# Altium PCB 1_ir-tara-f.PcbDoc (part 5 of 8)
Units mm, origin at the board's own origin, x right, y up, seen from the top; angles counter-clockwise.
Board outline 151 x 86.38 mm, 2 copper layers (Top Layer, Bottom Layer); 728 components, 20 nets, 2100 pads, 0 vias.
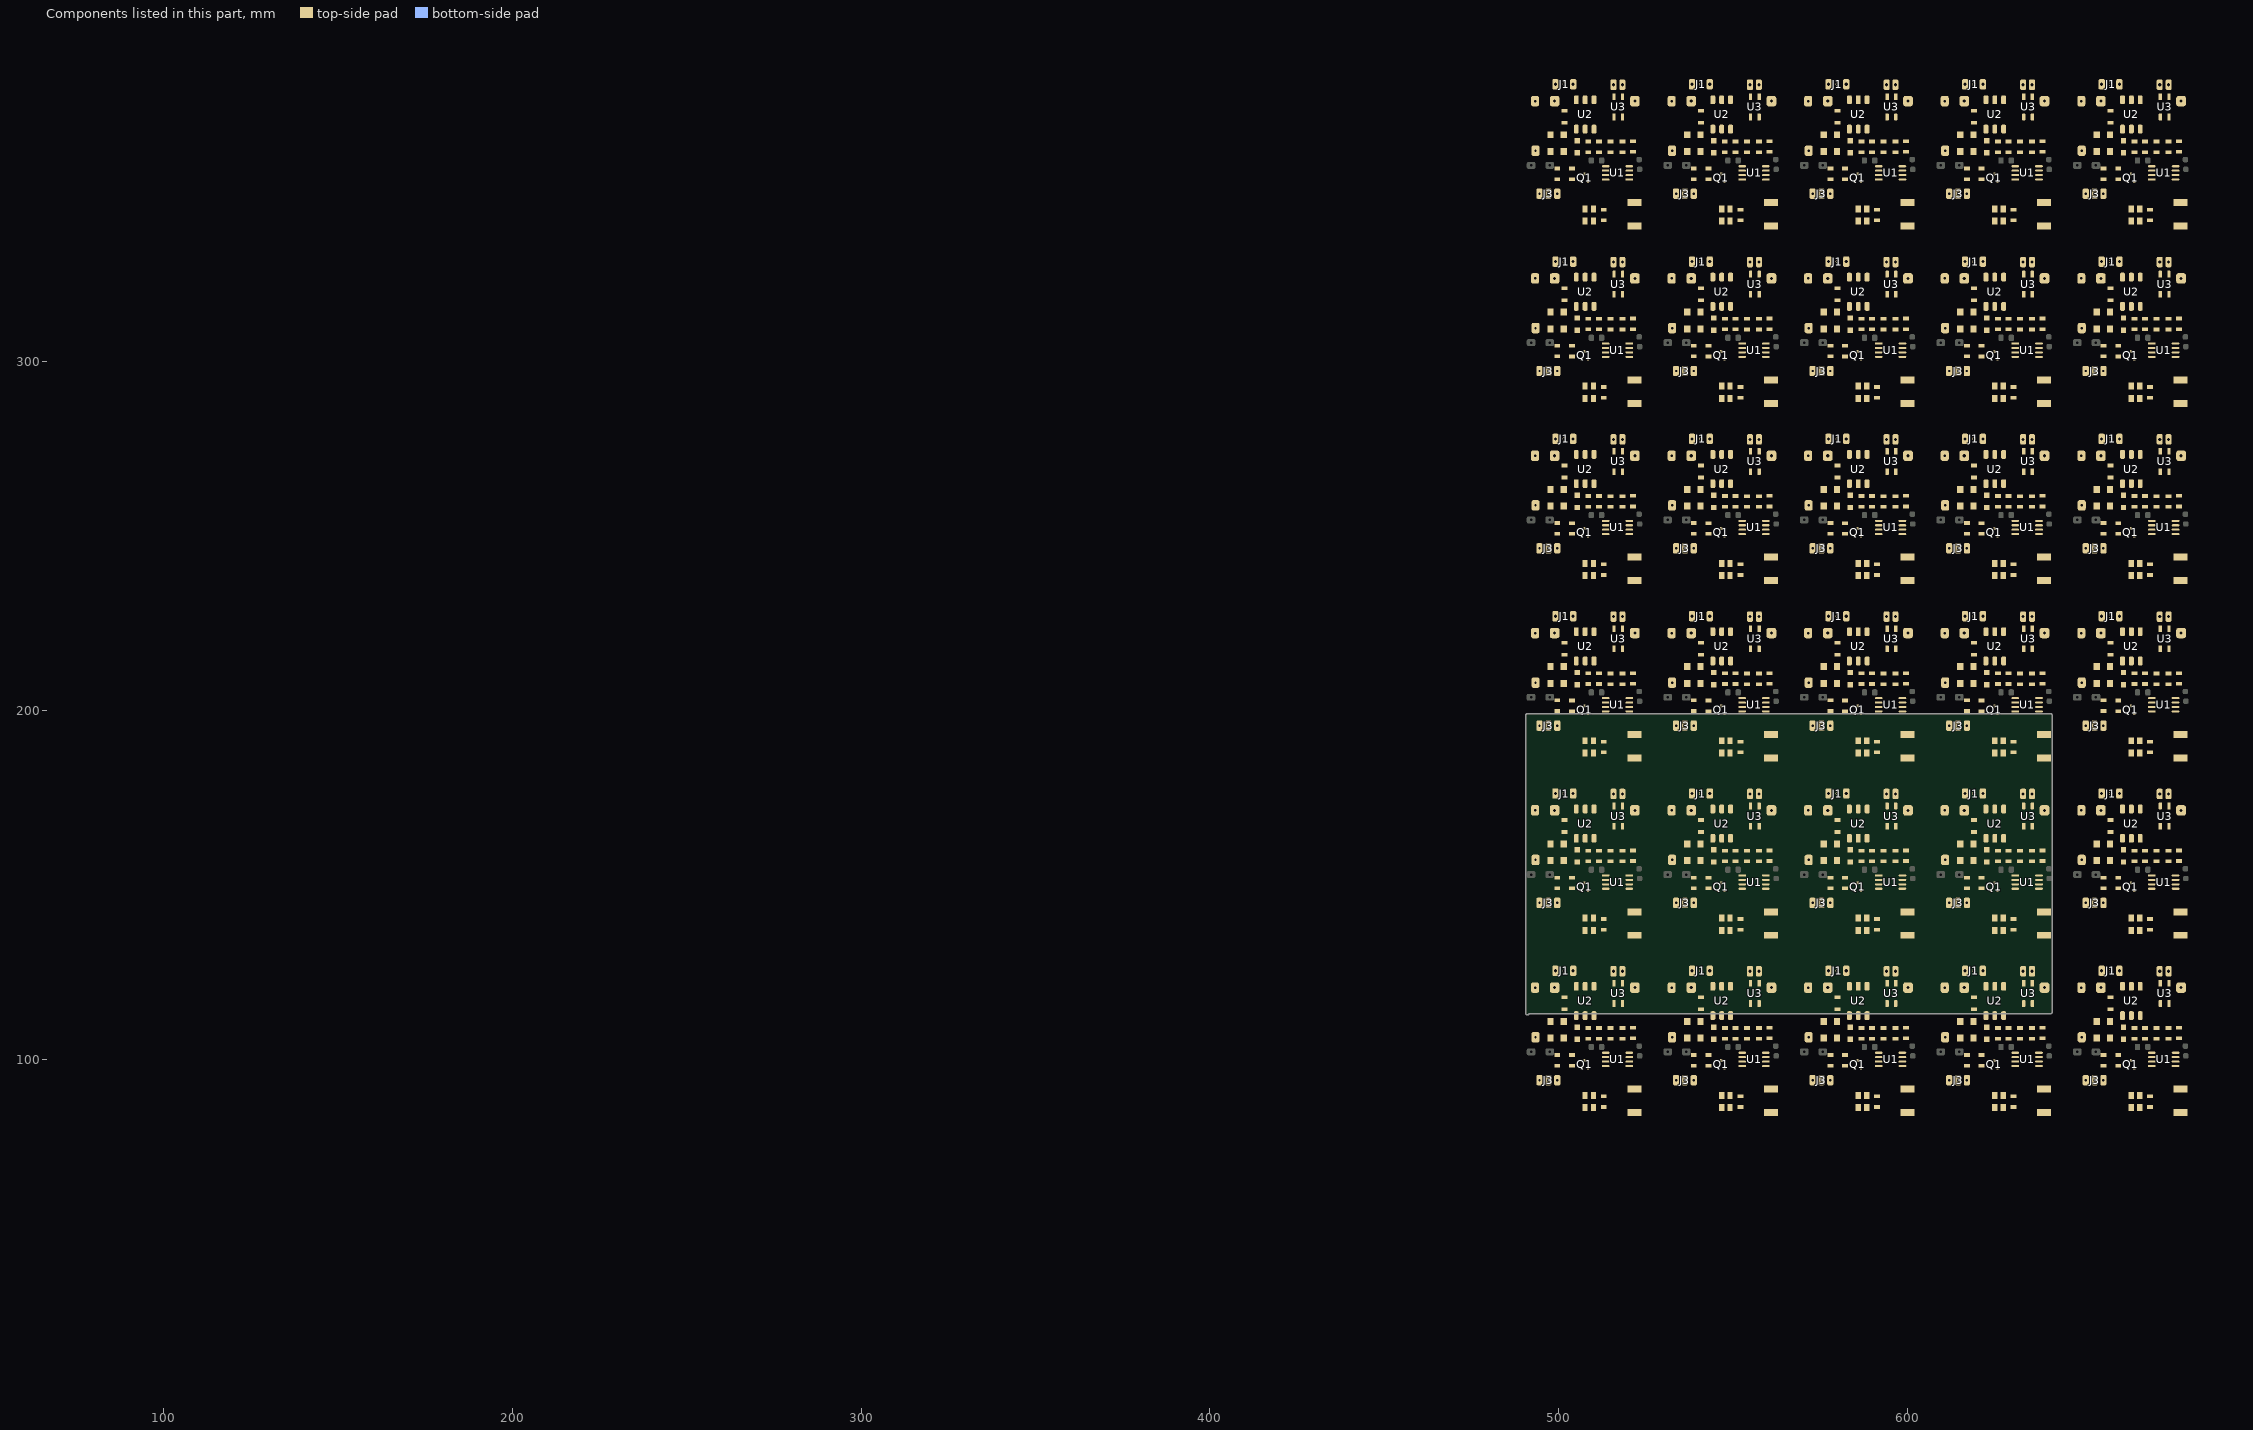
[diagram p5: the components of this part, seen from the top]

## Nets (pads, with @x,y where several pads share a name; then routed paths per layer and width w, separated by ;. In a path a pad name is that pad's centre, name@x,y a point inside that pad or via, vN(x,y) a via of type N, cw(c..) or ccw(c..) an arc to the next point about the centre after c; other vN are vias at no path point) (continued)
copper on no net: (continued)
  Top Layer w0.7: 501.619,117.921 510.382,117.921 515.335,112.968 518.383,112.968 ; 501.619,168.759 510.382,168.759 515.335,163.806 518.383,163.806 ; 501.619,219.598 510.382,219.598 515.335,214.645 518.383,214.645 ; 501.619,270.437 510.382,270.437 515.335,265.484 518.383,265.484 ; 501.619,321.275 510.382,321.275 515.335,316.322 518.383,316.322 ; 501.619,372.114 510.382,372.114 515.335,367.161 518.383,367.161 ; 503.833,98.206 504.158,98.206 504.433,97.931 504.433,97.835 504.726,97.542 506.561,97.542 ; 503.833,149.045 504.158,149.045 504.433,148.77 504.433,148.673 504.726,148.38 506.561,148.38 ; 503.833,199.884 504.158,199.884 504.433,199.609 504.433,199.512 504.726,199.219 506.561,199.219 ; 503.833,250.722 504.158,250.722 504.433,250.447 504.433,250.351 504.726,250.058 506.561,250.058 ; 503.833,301.561 504.158,301.561 504.433,301.286 504.433,301.189 504.726,300.896 506.561,300.896 ; 503.833,352.4 504.158,352.4 504.433,352.125 504.433,352.028 504.726,351.735 506.561,351.735 ; 505.175,112.982 505.175,115.225 505.585,115.635 510.382,115.635 512.541,113.476 512.541,112.333 514.7,110.174 514.7,108.993 ; 505.175,163.821 505.175,166.063 505.585,166.473 510.382,166.473 512.541,164.314 512.541,163.171 514.7,161.012 514.7,159.831 ; 505.175,214.659 505.175,216.902 505.585,217.312 510.382,217.312 512.541,215.153 512.541,214.01 514.7,211.851 514.7,210.67 ; 505.175,265.498 505.175,267.741 505.585,268.151 510.382,268.151 512.541,265.992 512.541,264.849 514.7,262.69 514.7,261.509 ; 505.175,316.337 505.175,318.579 505.585,318.989 510.382,318.989 512.541,316.83 512.541,315.687 514.7,313.528 514.7,312.347 ; 505.175,367.175 505.175,369.418 505.585,369.828 510.382,369.828 512.541,367.669 512.541,366.526 514.7,364.367 514.7,363.186 ; 508.411,97.607 508.411,97.241 508.35,97.18 508.35,96.331 504.667,92.648 504.667,84.236 505.018,83.885 519.796,83.885 521.193,85.282 521.431,85.282 ; 508.411,148.446 508.411,148.08 508.35,148.019 508.35,147.169 504.667,143.486 504.667,135.075 505.018,134.723 519.796,134.723 521.193,136.12 521.431,136.12 ; 508.411,199.284 508.411,198.918 508.35,198.857 508.35,198.008 504.667,194.325 504.667,185.913 505.018,185.562 519.796,185.562 521.193,186.959 521.431,186.959 ; 508.411,250.123 508.411,249.757 508.35,249.696 508.35,248.847 504.667,245.164 504.667,236.752 505.018,236.401 519.796,236.401 521.193,237.798 521.431,237.798 ; 508.411,300.961 508.411,300.596 508.35,300.535 508.35,299.685 504.667,296.002 504.667,287.591 505.018,287.239 519.796,287.239 521.193,288.636 521.431,288.636 ; 508.411,351.8 508.411,351.434 508.35,351.373 508.35,350.524 504.667,346.841 504.667,338.429 505.018,338.078 519.796,338.078 521.193,339.475 521.431,339.475 ; 510.128,120.969 510.128,120.419 510.478,120.069 510.647,120.069 514.212,116.503 515.783,116.503 515.888,116.398 515.888,116.037 ; 510.128,171.807 510.128,171.257 510.478,170.907 510.647,170.907 514.212,167.342 515.783,167.342 515.888,167.237 515.888,166.875 ; 510.128,222.646 510.128,222.096 510.478,221.746 510.647,221.746 514.212,218.18 515.783,218.18 515.888,218.075 515.888,217.714 ; 510.128,273.485 510.128,272.935 510.478,272.585 510.647,272.585 514.212,269.019 515.783,269.019 515.888,268.914 515.888,268.553 ; 510.128,324.323 510.128,323.773 510.478,323.423 510.647,323.423 514.212,319.858 515.783,319.858 515.888,319.753 515.888,319.391 ; 510.128,375.162 510.128,374.612 510.478,374.262 510.647,374.262 514.212,370.696 515.783,370.696 515.888,370.591 515.888,370.23 ; 512.125,108.685 513.331,107.479 520.006,107.479 520.745,108.218 520.745,108.819 ; 512.125,159.523 513.331,158.318 520.006,158.318 520.745,159.056 520.745,159.658 ; 512.125,210.362 513.331,209.156 520.006,209.156 520.745,209.895 520.745,210.497 ; 512.125,261.201 513.331,259.995 520.006,259.995 520.745,260.734 520.745,261.335 ; 512.125,312.039 513.331,310.834 520.006,310.834 520.745,311.572 520.745,312.174 ; 512.125,362.878 513.33,361.672 520.006,361.672 520.745,362.411 520.745,363.012 ; 515.239,105.856 515.427,105.668 515.427,105.541 516.224,104.744 516.224,101.157 515.716,100.649 ; 515.239,156.694 515.427,156.507 515.427,156.38 516.224,155.583 516.224,151.995 515.716,151.487 ; 515.239,207.533 515.427,207.345 515.427,207.218 516.224,206.421 516.224,202.834 515.716,202.326 ; 515.239,258.372 515.427,258.184 515.427,258.057 516.224,257.26 516.224,253.673 515.716,253.165 ; 515.239,309.21 515.427,309.023 515.427,308.896 516.224,308.099 516.224,304.511 515.716,304.003 ; 515.239,360.049 515.427,359.861 515.427,359.734 516.224,358.937 516.224,355.35 515.716,354.842 ; 517.756,100.149 517.756,105.768 517.931,105.943 518.256,105.943 ; 517.756,150.987 517.756,156.607 517.931,156.782 518.256,156.782 ; 517.756,201.826 517.756,207.445 517.931,207.62 518.256,207.62 ; 517.756,252.665 517.756,258.284 517.931,258.459 518.256,258.459 ; 517.756,303.503 517.756,309.123 517.931,309.298 518.256,309.298 ; 517.756,354.342 517.756,359.961 517.931,360.136 518.256,360.136 ; 518.637,105.856 518.767,105.986 521.304,105.986 ; 518.637,156.694 518.767,156.824 521.304,156.824 ; 518.637,207.533 518.767,207.663 521.304,207.663 ; 518.637,258.372 518.767,258.502 521.304,258.502 ; 518.637,309.21 518.767,309.34 521.304,309.34 ; 518.637,360.049 518.767,360.179 521.304,360.179 ; 540.773,117.921 549.536,117.921 554.489,112.968 557.537,112.968 ; 540.773,168.759 549.536,168.759 554.489,163.806 557.537,163.806 ; 540.773,219.598 549.536,219.598 554.489,214.645 557.537,214.645 ; 540.773,270.437 549.536,270.437 554.489,265.484 557.537,265.484 ; 540.773,321.275 549.536,321.275 554.489,316.322 557.537,316.322 ; 540.773,372.114 549.536,372.114 554.489,367.161 557.537,367.161 ; 542.988,98.206 543.313,98.206 543.588,97.931 543.588,97.835 543.881,97.542 545.715,97.542 ; 542.988,149.045 543.313,149.045 543.588,148.77 543.588,148.673 543.881,148.38 545.715,148.38 ; 542.988,199.884 543.313,199.884 543.588,199.609 543.588,199.512 543.881,199.219 545.715,199.219 ; 542.988,250.722 543.313,250.722 543.588,250.447 543.588,250.351 543.881,250.058 545.715,250.058 ; 542.988,301.561 543.313,301.561 543.588,301.286 543.588,301.189 543.881,300.896 545.715,300.896 ; 542.988,352.4 543.313,352.4 543.588,352.125 543.588,352.028 543.881,351.735 545.715,351.735 ; 544.329,112.982 544.329,115.225 544.74,115.635 549.536,115.635 551.695,113.476 551.695,112.333 553.854,110.174 553.854,108.993 ; 544.329,163.821 544.329,166.063 544.74,166.473 549.536,166.473 551.695,164.314 551.695,163.171 553.854,161.012 553.854,159.831 ; 544.329,214.659 544.329,216.902 544.739,217.312 549.536,217.312 551.695,215.153 551.695,214.01 553.854,211.851 553.854,210.67 ; 544.329,265.498 544.329,267.741 544.739,268.151 549.536,268.151 551.695,265.992 551.695,264.849 553.854,262.69 553.854,261.509 ; 544.329,316.337 544.329,318.579 544.739,318.989 549.536,318.989 551.695,316.83 551.695,315.687 553.854,313.528 553.854,312.347 ; 544.329,367.175 544.329,369.418 544.739,369.828 549.536,369.828 551.695,367.669 551.695,366.526 553.854,364.367 553.854,363.186 ; 547.565,97.607 547.565,97.241 547.504,97.18 547.504,96.331 543.821,92.648 543.821,84.236 544.173,83.885 558.95,83.885 560.347,85.282 560.585,85.282 ; 547.565,148.446 547.565,148.08 547.504,148.019 547.504,147.169 543.821,143.486 543.821,135.075 544.173,134.723 558.95,134.723 560.347,136.12 560.585,136.12 ; 547.565,199.284 547.565,198.918 547.504,198.857 547.504,198.008 543.821,194.325 543.821,185.913 544.173,185.562 558.95,185.562 560.347,186.959 560.585,186.959 ; 547.565,250.123 547.565,249.757 547.504,249.696 547.504,248.847 543.821,245.164 543.821,236.752 544.173,236.401 558.95,236.401 560.347,237.798 560.585,237.798 ; 547.565,300.961 547.565,300.596 547.504,300.535 547.504,299.685 543.821,296.002 543.821,287.591 544.173,287.239 558.95,287.239 560.347,288.636 560.585,288.636 ; 547.565,351.8 547.565,351.434 547.504,351.373 547.504,350.524 543.821,346.841 543.821,338.429 544.173,338.078 558.95,338.078 560.347,339.475 560.585,339.475 ; 549.282,120.969 549.282,120.419 549.632,120.069 549.801,120.069 553.367,116.503 554.937,116.503 555.042,116.398 555.042,116.037 ; 549.282,171.807 549.282,171.257 549.632,170.907 549.801,170.907 553.367,167.342 554.937,167.342 555.042,167.237 555.042,166.875 ; 549.282,222.646 549.282,222.096 549.632,221.746 549.801,221.746 553.367,218.18 554.937,218.18 555.042,218.075 555.042,217.714 ; 549.282,273.485 549.282,272.935 549.632,272.585 549.801,272.585 553.367,269.019 554.937,269.019 555.042,268.914 555.042,268.553 ; 549.282,324.323 549.282,323.773 549.632,323.423 549.801,323.423 553.367,319.858 554.937,319.858 555.042,319.753 555.042,319.391 ; 549.282,375.162 549.282,374.612 549.632,374.262 549.801,374.262 553.367,370.696 554.937,370.696 555.042,370.591 555.042,370.23 ; 551.279,108.685 552.485,107.479 559.161,107.479 559.899,108.218 559.899,108.819 ; 551.279,159.523 552.485,158.318 559.161,158.318 559.899,159.056 559.899,159.658 ; 551.279,210.362 552.485,209.156 559.161,209.156 559.899,209.895 559.899,210.497 ; 551.279,261.201 552.485,259.995 559.161,259.995 559.899,260.734 559.899,261.335 ; 551.279,312.039 552.485,310.834 559.161,310.834 559.899,311.572 559.899,312.174 ; 551.279,362.878 552.485,361.672 559.161,361.672 559.899,362.411 559.899,363.012 ; 554.394,258.372 554.581,258.184 554.581,258.057 555.378,257.26 555.378,253.673 554.87,253.165 ; 554.394,309.21 554.581,309.023 554.581,308.896 555.378,308.099 555.378,304.511 554.87,304.003 ; 554.394,360.049 554.581,359.861 554.581,359.734 555.378,358.937 555.378,355.35 554.87,354.842 ; 554.394,105.856 554.581,105.668 554.581,105.541 555.378,104.744 555.378,101.157 554.87,100.649 ; 554.394,156.694 554.581,156.507 554.581,156.38 555.378,155.583 555.378,151.995 554.87,151.487 ; 554.394,207.533 554.581,207.345 554.581,207.218 555.378,206.421 555.378,202.834 554.87,202.326 ; 556.91,100.149 556.91,105.768 557.085,105.943 557.41,105.943 ; 556.91,150.987 556.91,156.607 557.085,156.782 557.41,156.782 ; 556.91,201.826 556.91,207.445 557.085,207.62 557.41,207.62 ; 556.91,252.665 556.91,258.284 557.085,258.459 557.41,258.459 ; 556.91,303.503 556.91,309.123 557.085,309.298 557.41,309.298 ; 556.91,354.342 556.91,359.961 557.085,360.136 557.41,360.136 ; 557.791,105.856 557.922,105.986 560.458,105.986 ; 557.791,156.694 557.922,156.824 560.458,156.824 ; 557.791,207.533 557.922,207.663 560.458,207.663 ; 557.791,258.372 557.922,258.502 560.458,258.502 ; 557.791,309.21 557.922,309.34 560.458,309.34 ; 557.791,360.049 557.922,360.179 560.458,360.179 ; 579.928,117.921 588.691,117.921 593.644,112.968 596.692,112.968 ; 579.928,219.598 588.691,219.598 593.644,214.645 596.692,214.645 ; 579.928,270.437 588.691,270.437 593.644,265.484 596.692,265.484 ; 579.928,321.275 588.691,321.275 593.644,316.322 596.692,316.322 ; 579.928,372.114 588.691,372.114 593.644,367.161 596.692,367.161 ; 582.142,98.206 582.467,98.206 582.742,97.931 582.742,97.835 583.035,97.542 584.87,97.542 ; 582.142,199.884 582.467,199.884 582.742,199.609 582.742,199.512 583.035,199.219 584.87,199.219 ; 582.142,250.722 582.467,250.722 582.742,250.447 582.742,250.351 583.035,250.058 584.87,250.058 ; 582.142,301.561 582.467,301.561 582.742,301.286 582.742,301.189 583.035,300.896 584.87,300.896 ; 582.142,352.4 582.467,352.4 582.742,352.125 582.742,352.028 583.035,351.735 584.87,351.735 ; 583.484,112.982 583.484,115.225 583.894,115.635 588.691,115.635 590.85,113.476 590.85,112.333 593.009,110.174 593.009,108.993 ; 583.484,214.659 583.484,216.902 583.894,217.312 588.691,217.312 590.85,215.153 590.85,214.01 593.009,211.851 593.009,210.67 ; 583.484,265.498 583.484,267.741 583.894,268.151 588.691,268.151 590.85,265.992 590.85,264.849 593.009,262.69 593.009,261.509 ; 583.484,316.337 583.484,318.579 583.894,318.989 588.691,318.989 590.85,316.83 590.85,315.687 593.009,313.528 593.009,312.347 ; 583.484,367.175 583.484,369.418 583.894,369.828 588.691,369.828 590.85,367.669 590.85,366.526 593.009,364.367 593.009,363.186 ; 586.72,97.607 586.72,97.241 586.659,97.18 586.659,96.331 582.976,92.648 582.976,84.236 583.328,83.885 598.105,83.885 599.502,85.282 599.74,85.282 ; 586.72,199.284 586.72,198.918 586.659,198.857 586.659,198.008 582.976,194.325 582.976,185.913 583.328,185.562 598.105,185.562 599.502,186.959 599.74,186.959 ; 586.72,250.123 586.72,249.757 586.659,249.696 586.659,248.847 582.976,245.164 582.976,236.752 583.328,236.401 598.105,236.401 599.502,237.798 599.74,237.798 ; 586.72,300.961 586.72,300.596 586.659,300.535 586.659,299.685 582.976,296.002 582.976,287.591 583.328,287.239 598.105,287.239 599.502,288.636 599.74,288.636 ; 586.72,351.8 586.72,351.434 586.659,351.373 586.659,350.524 582.976,346.841 582.976,338.429 583.328,338.078 598.105,338.078 599.502,339.475 599.74,339.475 ; 588.437,120.969 588.437,120.419 588.787,120.069 588.956,120.069 592.522,116.503 594.092,116.503 594.197,116.398 594.197,116.037 ; 588.437,222.646 588.437,222.096 588.787,221.746 588.956,221.746 592.522,218.18 594.092,218.18 594.197,218.075 594.197,217.714 ; 588.437,273.485 588.437,272.935 588.787,272.585 588.956,272.585 592.522,269.019 594.092,269.019 594.197,268.914 594.197,268.553 ; 588.437,324.323 588.437,323.773 588.787,323.423 588.956,323.423 592.522,319.858 594.092,319.858 594.197,319.753 594.197,319.391 ; 588.437,375.162 588.437,374.612 588.787,374.262 588.956,374.262 592.522,370.696 594.092,370.696 594.197,370.591 594.197,370.23 ; 590.434,108.685 591.64,107.479 598.315,107.479 599.054,108.218 599.054,108.819 ; 590.434,210.362 591.64,209.156 598.315,209.156 599.054,209.895 599.054,210.497 ; 590.434,261.201 591.64,259.995 598.315,259.995 599.054,260.734 599.054,261.335 ; 590.434,312.039 591.64,310.834 598.315,310.834 599.054,311.572 599.054,312.174 ; 590.434,362.878 591.64,361.672 598.315,361.672 599.054,362.411 599.054,363.012 ; 593.548,105.856 593.736,105.668 593.736,105.541 594.533,104.744 594.533,101.157 594.025,100.649 ; 593.548,207.533 593.736,207.345 593.736,207.218 594.533,206.421 594.533,202.834 594.025,202.326 ; 593.548,258.372 593.736,258.184 593.736,258.057 594.533,257.26 594.533,253.673 594.025,253.165 ; 593.548,309.21 593.736,309.023 593.736,308.896 594.533,308.099 594.533,304.511 594.025,304.003 ; 593.548,360.049 593.736,359.861 593.736,359.734 594.533,358.937 594.533,355.35 594.025,354.842 ; 596.065,100.149 596.065,105.768 596.24,105.943 596.565,105.943 ; 596.065,201.826 596.065,207.445 596.24,207.62 596.565,207.62 ; 596.065,252.665 596.065,258.284 596.24,258.459 596.565,258.459 ; 596.065,303.503 596.065,309.123 596.24,309.298 596.565,309.298 ; 596.065,354.342 596.065,359.961 596.24,360.136 596.565,360.136 ; 596.946,105.856 597.076,105.986 599.613,105.986 ; 596.946,207.533 597.076,207.663 599.613,207.663 ; 596.946,258.372 597.076,258.502 599.613,258.502 ; 596.946,309.21 597.076,309.34 599.613,309.34 ; 596.946,360.049 597.076,360.179 599.613,360.179 ; 619.083,117.921 627.846,117.921 632.799,112.968 635.847,112.968 ; 619.083,168.759 627.846,168.759 632.799,163.806 635.847,163.806 ; 619.083,219.598 627.846,219.598 632.799,214.645 635.847,214.645 ; 619.083,270.437 627.846,270.437 632.799,265.484 635.847,265.484 ; 619.083,321.275 627.846,321.275 632.799,316.322 635.847,316.322 ; 619.083,372.114 627.846,372.114 632.799,367.161 635.847,367.161 ; 621.297,98.206 621.622,98.206 621.897,97.931 621.897,97.835 622.19,97.542 624.025,97.542 ; 621.297,149.045 621.622,149.045 621.897,148.77 621.897,148.673 622.19,148.38 624.025,148.38 ; 621.297,199.884 621.622,199.884 621.897,199.609 621.897,199.512 622.19,199.219 624.025,199.219 ; 621.297,250.722 621.622,250.722 621.897,250.447 621.897,250.351 622.19,250.058 624.025,250.058 ; 621.297,301.561 621.622,301.561 621.897,301.286 621.897,301.189 622.19,300.896 624.025,300.896 ; 621.297,352.4 621.622,352.4 621.897,352.125 621.897,352.028 622.19,351.735 624.025,351.735 ; 622.639,112.982 622.639,115.225 623.049,115.635 627.846,115.635 630.005,113.476 630.005,112.333 632.164,110.174 632.164,108.993 ; 622.639,163.821 622.639,166.063 623.049,166.473 627.846,166.473 630.005,164.314 630.005,163.171 632.164,161.012 632.164,159.831 ; 622.639,214.659 622.639,216.902 623.049,217.312 627.846,217.312 630.005,215.153 630.005,214.01 632.164,211.851 632.164,210.67 ; 622.639,265.498 622.639,267.741 623.049,268.151 627.846,268.151 630.005,265.992 630.005,264.849 632.164,262.69 632.164,261.509 ; 622.639,316.337 622.639,318.579 623.049,318.989 627.846,318.989 630.005,316.83 630.005,315.687 632.164,313.528 632.164,312.347 ; 622.639,367.175 622.639,369.418 623.049,369.828 627.846,369.828 630.005,367.669 630.005,366.526 632.164,364.367 632.164,363.186 ; 625.875,97.607 625.875,97.241 625.814,97.18 625.814,96.331 622.131,92.648 622.131,84.236 622.482,83.885 637.26,83.885 638.657,85.282 638.895,85.282 ; 625.875,148.446 625.875,148.08 625.814,148.019 625.814,147.169 622.131,143.486 622.131,135.075 622.482,134.723 637.26,134.723 638.657,136.12 638.895,136.12 ; 625.875,199.284 625.875,198.918 625.814,198.857 625.814,198.008 622.131,194.325 622.131,185.913 622.482,185.562 637.26,185.562 638.657,186.959 638.895,186.959 ; 625.875,250.123 625.875,249.757 625.814,249.696 625.814,248.847 622.131,245.164 622.131,236.752 622.482,236.401 637.26,236.401 638.657,237.798 638.895,237.798 ; 625.875,300.961 625.875,300.596 625.814,300.535 625.814,299.685 622.131,296.002 622.131,287.591 622.482,287.239 637.26,287.239 638.657,288.636 638.895,288.636 ; 625.875,351.8 625.875,351.434 625.814,351.373 625.814,350.524 622.131,346.841 622.131,338.429 622.482,338.078 637.26,338.078 638.657,339.475 638.895,339.475 ; 627.592,120.969 627.592,120.419 627.942,120.069 628.111,120.069 631.676,116.503 633.247,116.503 633.352,116.398 633.352,116.037 ; 627.592,171.807 627.592,171.257 627.942,170.907 628.111,170.907 631.676,167.342 633.247,167.342 633.352,167.237 633.352,166.875 ; 627.592,222.646 627.592,222.096 627.942,221.746 628.111,221.746 631.676,218.18 633.247,218.18 633.352,218.075 633.352,217.714 ; 627.592,273.485 627.592,272.935 627.942,272.585 628.111,272.585 631.676,269.019 633.247,269.019 633.352,268.914 633.352,268.553 ; 627.592,324.323 627.592,323.773 627.942,323.423 628.111,323.423 631.676,319.858 633.247,319.858 633.352,319.753 633.352,319.391 ; 627.592,375.162 627.592,374.612 627.942,374.262 628.111,374.262 631.676,370.696 633.247,370.696 633.352,370.591 633.352,370.23 ; 629.589,108.685 630.794,107.479 637.47,107.479 638.209,108.218 638.209,108.819 ; 629.589,159.523 630.794,158.318 637.47,158.318 638.209,159.056 638.209,159.658 ; 629.589,210.362 630.794,209.156 637.47,209.156 638.209,209.895 638.209,210.497 ; 629.589,261.201 630.794,259.995 637.47,259.995 638.209,260.734 638.209,261.335 ; 629.589,312.039 630.794,310.834 637.47,310.834 638.209,311.572 638.209,312.174 ; 629.589,362.878 630.794,361.672 637.47,361.672 638.209,362.411 638.209,363.012 ; 632.703,105.856 632.891,105.668 632.891,105.541 633.688,104.744 633.688,101.157 633.18,100.649 ; 632.703,156.694 632.891,156.507 632.891,156.38 633.688,155.583 633.688,151.995 633.18,151.487 ; 632.703,207.533 632.891,207.345 632.891,207.218 633.688,206.421 633.688,202.834 633.18,202.326 ; 632.703,258.372 632.891,258.184 632.891,258.057 633.688,257.26 633.688,253.673 633.18,253.165 ; 632.703,309.21 632.891,309.023 632.891,308.896 633.688,308.099 633.688,304.511 633.18,304.003 ; 632.703,360.049 632.891,359.861 632.891,359.734 633.688,358.937 633.688,355.35 633.18,354.842 ; 635.22,100.149 635.22,105.768 635.395,105.943 635.72,105.943 ; 635.22,150.987 635.22,156.607 635.395,156.782 635.72,156.782 ; 635.22,201.826 635.22,207.445 635.395,207.62 635.72,207.62 ; 635.22,252.665 635.22,258.284 635.395,258.459 635.72,258.459 ; 635.22,303.503 635.22,309.123 635.395,309.298 635.72,309.298 ; 635.22,354.342 635.22,359.961 635.395,360.136 635.72,360.136 ; 636.101,105.856 636.231,105.986 638.768,105.986 ; 636.101,156.694 636.231,156.824 638.768,156.824 ; 636.101,207.533 636.231,207.663 638.768,207.663 ; 636.101,258.372 636.231,258.502 638.768,258.502 ; 636.101,309.21 636.231,309.34 638.768,309.34 ; 636.101,360.049 636.231,360.179 638.768,360.179 ; 658.237,117.921 667,117.921 671.953,112.968 675.001,112.968 ; 658.237,168.759 667,168.759 671.953,163.806 675.001,163.806 ; 658.237,219.598 667,219.598 671.953,214.645 675.001,214.645 ; 658.237,270.437 667,270.437 671.953,265.484 675.001,265.484 ; 658.237,321.275 667,321.275 671.953,316.322 675.001,316.322 ; 658.237,372.114 667,372.114 671.953,367.161 675.001,367.161 ; 660.452,98.206 660.777,98.206 661.052,97.931 661.052,97.835 661.344,97.542 663.179,97.542 ; 660.452,149.045 660.777,149.045 661.052,148.77 661.052,148.673 661.344,148.38 663.179,148.38 ; 660.452,199.884 660.777,199.884 661.052,199.609 661.052,199.512 661.344,199.219 663.179,199.219 ; 660.452,250.722 660.777,250.722 661.052,250.447 661.052,250.351 661.344,250.058 663.179,250.058 ; 660.452,301.561 660.777,301.561 661.052,301.286 661.052,301.189 661.344,300.896 663.179,300.896 ; 660.451,352.4 660.776,352.4 661.051,352.125 661.051,352.028 661.344,351.735 663.179,351.735 ; 661.793,112.982 661.793,115.225 662.203,115.635 667,115.635 669.159,113.476 669.159,112.333 671.318,110.174 671.318,108.993 ; 661.793,163.821 661.793,166.063 662.203,166.473 667,166.473 669.159,164.314 669.159,163.171 671.318,161.012 671.318,159.831 ; 661.793,214.659 661.793,216.902 662.203,217.312 667,217.312 669.159,215.153 669.159,214.01 671.318,211.851 671.318,210.67 ; 661.793,265.498 661.793,267.741 662.203,268.151 667,268.151 669.159,265.992 669.159,264.849 671.318,262.69 671.318,261.509 ; 661.793,316.337 661.793,318.579 662.203,318.989 667,318.989 669.159,316.83 669.159,315.687 671.318,313.528 671.318,312.347 ; 661.793,367.175 661.793,369.418 662.203,369.828 667,369.828 669.159,367.669 669.159,366.526 671.318,364.367 671.318,363.186 ; 665.029,97.607 665.029,97.241 664.968,97.18 664.968,96.331 661.285,92.648 661.285,84.236 661.637,83.885 676.414,83.885 677.811,85.282 678.049,85.282 ; 665.029,148.446 665.029,148.08 664.968,148.019 664.968,147.169 661.285,143.486 661.285,135.075 661.637,134.723 676.414,134.723 677.811,136.12 678.049,136.12 ; 665.029,199.284 665.029,198.918 664.968,198.857 664.968,198.008 661.285,194.325 661.285,185.913 661.637,185.562 676.414,185.562 677.811,186.959 678.049,186.959 ; 665.029,250.123 665.029,249.757 664.968,249.696 664.968,248.847 661.285,245.164 661.285,236.752 661.637,236.401 676.414,236.401 677.811,237.798 678.049,237.798 ; 665.029,300.961 665.029,300.596 664.968,300.535 664.968,299.685 661.285,296.002 661.285,287.591 661.637,287.239 676.414,287.239 677.811,288.636 678.049,288.636 ; 665.029,351.8 665.029,351.434 664.968,351.373 664.968,350.524 661.285,346.841 661.285,338.429 661.637,338.078 676.414,338.078 677.811,339.475 678.049,339.475 ; 666.746,120.969 666.746,120.419 667.096,120.069 667.265,120.069 670.831,116.503 672.401,116.503 672.506,116.398 672.506,116.037 ; 666.746,171.807 666.746,171.257 667.096,170.907 667.265,170.907 670.831,167.342 672.401,167.342 672.506,167.237 672.506,166.875 ; 666.746,222.646 666.746,222.096 667.096,221.746 667.265,221.746 670.831,218.18 672.401,218.18 672.506,218.075 672.506,217.714 ; 666.746,273.485 666.746,272.935 667.096,272.585 667.265,272.585 670.831,269.019 672.401,269.019 672.506,268.914 672.506,268.553 ; 666.746,324.323 666.746,323.773 667.096,323.423 667.265,323.423 670.831,319.858 672.401,319.858 672.506,319.753 672.506,319.391 ; 666.746,375.162 666.746,374.612 667.096,374.262 667.265,374.262 670.831,370.696 672.401,370.696 672.506,370.591 672.506,370.23 ; 668.743,108.685 669.949,107.479 676.625,107.479 677.363,108.218 677.363,108.819 ; 668.743,159.523 669.949,158.318 676.625,158.318 677.363,159.056 677.363,159.658 ; 668.743,210.362 669.949,209.156 676.625,209.156 677.363,209.895 677.363,210.497 ; 668.743,261.201 669.949,259.995 676.625,259.995 677.363,260.734 677.363,261.335 ; 668.743,312.039 669.949,310.834 676.625,310.834 677.363,311.572 677.363,312.174 ; 668.743,362.878 669.949,361.672 676.625,361.672 677.363,362.411 677.363,363.012 ; 671.858,105.856 672.045,105.668 672.045,105.541 672.842,104.744 672.842,101.157 672.334,100.649 ; 671.858,156.694 672.045,156.507 672.045,156.38 672.842,155.583 672.842,151.995 672.334,151.487 ; 671.858,207.533 672.045,207.345 672.045,207.218 672.842,206.421 672.842,202.834 672.334,202.326 ; 671.858,258.372 672.045,258.184 672.045,258.057 672.842,257.26 672.842,253.673 672.334,253.165 ; 671.858,309.21 672.045,309.023 672.045,308.896 672.842,308.099 672.842,304.511 672.334,304.003 ; 671.858,360.049 672.045,359.861 672.045,359.734 672.842,358.937 672.842,355.35 672.334,354.842 ; 674.374,100.149 674.374,105.768 674.549,105.943 674.874,105.943 ; 674.374,150.987 674.374,156.607 674.549,156.782 674.874,156.782 ; 674.374,201.826 674.374,207.445 674.549,207.62 674.874,207.62 ; 674.374,252.665 674.374,258.284 674.549,258.459 674.874,258.459 ; 674.374,303.503 674.374,309.123 674.549,309.298 674.874,309.298 ; 674.374,354.342 674.374,359.961 674.549,360.136 674.874,360.136 ; 675.255,105.856 675.385,105.986 677.922,105.986 ; 675.255,156.694 675.385,156.824 677.922,156.824 ; 675.255,207.533 675.385,207.663 677.922,207.663 ; 675.255,258.372 675.385,258.502 677.922,258.502 ; 675.255,309.21 675.385,309.34 677.922,309.34 ; 675.255,360.049 675.385,360.179 677.922,360.179
  Top Layer w0.8: 498.082,110.446 498.182,110.346 498.182,109.811 500.992,107.001 500.992,106.646 501.492,106.146 ; 498.082,161.284 498.182,161.184 498.182,160.649 500.992,157.839 500.992,157.484 501.492,156.984 ; 498.082,212.123 498.182,212.023 498.182,211.488 500.992,208.678 500.992,208.323 501.492,207.823 ; 498.082,262.962 498.182,262.862 498.182,262.327 500.992,259.517 500.992,259.162 501.492,258.662 ; 498.082,313.8 498.182,313.7 498.182,313.165 500.992,310.355 500.992,310 501.492,309.5 ; 498.082,364.639 498.182,364.539 498.182,364.004 500.992,361.194 500.992,360.839 501.492,360.339 ; 498.952,124.914 499.352,124.514 499.979,124.514 503.524,120.969 505.048,120.969 ; 498.952,175.752 499.352,175.352 499.979,175.352 503.524,171.807 505.048,171.807 ; 498.952,226.591 499.352,226.191 499.979,226.191 503.524,222.646 505.048,222.646 ; 498.952,277.43 499.352,277.03 499.979,277.03 503.524,273.485 505.048,273.485 ; 498.952,328.268 499.352,327.868 499.979,327.868 503.524,324.323 505.048,324.323 ; 498.952,379.107 499.352,378.707 499.979,378.707 503.524,375.162 505.048,375.162 ; 501.732,106.386 502,106.119 502,106.019 ; 501.732,157.225 502,156.957 502,156.857 ; 501.732,208.064 502,207.796 502,207.696 ; 501.732,258.902 502,258.635 502,258.535 ; 501.732,309.741 502,309.473 502,309.373 ; 501.732,360.579 502,360.312 502,360.212 ; 512.033,104.136 512.033,105.749 ; 512.033,154.975 512.033,156.587 ; 512.033,205.814 512.033,207.426 ; 512.033,256.652 512.033,258.265 ; 512.033,307.491 512.033,309.103 ; 512.033,358.329 512.033,359.942 ; 520.796,102.173 520.796,102.681 521.939,103.824 523.082,103.824 ; 520.796,153.011 520.796,153.519 521.939,154.662 523.082,154.662 ; 520.796,203.85 520.796,204.358 521.939,205.501 523.082,205.501 ; 520.796,254.689 520.796,255.197 521.939,256.34 523.082,256.34 ; 520.796,305.527 520.796,306.035 521.939,307.178 523.082,307.178 ; 520.796,356.366 520.796,356.874 521.939,358.017 523.082,358.017 ; 537.236,110.446 537.336,110.346 537.336,109.811 540.146,107.001 540.146,106.646 540.646,106.146 ; 537.236,161.284 537.336,161.184 537.336,160.649 540.146,157.839 540.146,157.484 540.646,156.984 ; 537.236,212.123 537.336,212.023 537.336,211.488 540.146,208.678 540.146,208.323 540.646,207.823 ; 537.236,262.962 537.336,262.862 537.336,262.327 540.146,259.517 540.146,259.162 540.646,258.662 ; 537.236,313.8 537.336,313.7 537.336,313.165 540.146,310.355 540.146,310 540.646,309.5 ; 537.236,364.639 537.336,364.539 537.336,364.004 540.146,361.194 540.146,360.839 540.646,360.339 ; 538.106,124.914 538.506,124.514 539.133,124.514 542.678,120.969 544.202,120.969 ; 538.106,175.752 538.506,175.352 539.133,175.352 542.678,171.807 544.202,171.807 ; 538.106,226.591 538.506,226.191 539.133,226.191 542.678,222.646 544.202,222.646 ; 538.106,277.43 538.506,277.03 539.133,277.03 542.678,273.485 544.202,273.485 ; 538.106,328.268 538.506,327.868 539.133,327.868 542.678,324.323 544.202,324.323 ; 538.106,379.107 538.506,378.707 539.133,378.707 542.678,375.162 544.202,375.162 ; 540.887,106.386 541.154,106.119 541.154,106.019 ; 540.887,157.225 541.154,156.957 541.154,156.857 ; 540.887,208.064 541.154,207.796 541.154,207.696 ; 540.887,258.902 541.154,258.635 541.154,258.535 ; 540.887,309.741 541.154,309.473 541.154,309.373 ; 540.887,360.579 541.154,360.312 541.154,360.212 ; 551.187,104.136 551.187,105.749 ; 551.187,154.975 551.187,156.587 ; 551.187,205.814 551.187,207.426 ; 551.187,256.652 551.187,258.265 ; 551.187,307.491 551.187,309.103 ; 551.187,358.329 551.187,359.942 ; 559.95,102.173 559.95,102.681 561.093,103.824 562.236,103.824 ; 559.95,153.011 559.95,153.519 561.093,154.662 562.236,154.662 ; 559.95,203.85 559.95,204.358 561.093,205.501 562.236,205.501 ; 559.95,254.689 559.95,255.197 561.093,256.34 562.236,256.34 ; 559.95,305.527 559.95,306.035 561.093,307.178 562.236,307.178 ; 559.95,356.366 559.95,356.874 561.093,358.017 562.236,358.017 ; 576.391,110.446 576.491,110.346 576.491,109.811 579.301,107.001 579.301,106.646 579.801,106.146 ; 576.391,212.123 576.491,212.023 576.491,211.488 579.301,208.678 579.301,208.323 579.801,207.823 ; 576.391,262.962 576.491,262.862 576.491,262.327 579.301,259.517 579.301,259.162 579.801,258.662 ; 576.391,313.8 576.491,313.7 576.491,313.165 579.301,310.355 579.301,310 579.801,309.5 ; 576.391,364.639 576.491,364.539 576.491,364.004 579.301,361.194 579.301,360.839 579.801,360.339 ; 577.261,124.914 577.661,124.514 578.288,124.514 581.833,120.969 583.357,120.969 ; 577.261,226.591 577.661,226.191 578.288,226.191 581.833,222.646 583.357,222.646 ; 577.261,277.43 577.661,277.03 578.288,277.03 581.833,273.485 583.357,273.485 ; 577.261,328.268 577.661,327.868 578.288,327.868 581.833,324.323 583.357,324.323 ; 577.261,379.107 577.661,378.707 578.288,378.707 581.833,375.162 583.357,375.162 ; 580.042,106.386 580.309,106.119 580.309,106.019 ; 580.042,208.064 580.309,207.796 580.309,207.696 ; 580.042,258.902 580.309,258.635 580.309,258.535 ; 580.042,309.741 580.309,309.473 580.309,309.373 ; 580.042,360.579 580.309,360.312 580.309,360.212 ; 590.342,104.136 590.342,105.749 ; 590.342,205.814 590.342,207.426 ; 590.342,256.652 590.342,258.265 ; 590.342,307.491 590.342,309.103 ; 590.342,358.329 590.342,359.942 ; 599.105,102.173 599.105,102.681 600.248,103.824 601.391,103.824 ; 599.105,203.85 599.105,204.358 600.248,205.501 601.391,205.501 ; 599.105,254.689 599.105,255.197 600.248,256.34 601.391,256.34 ; 599.105,305.527 599.105,306.035 600.248,307.178 601.391,307.178 ; 599.105,356.366 599.105,356.874 600.248,358.017 601.391,358.017 ; 615.546,110.446 615.646,110.346 615.646,109.811 618.456,107.001 618.456,106.646 618.956,106.146 ; 615.546,161.284 615.646,161.184 615.646,160.649 618.456,157.839 618.456,157.484 618.956,156.984 ; 615.546,212.123 615.646,212.023 615.646,211.488 618.456,208.678 618.456,208.323 618.956,207.823 ; 615.546,262.962 615.646,262.862 615.646,262.327 618.456,259.517 618.456,259.162 618.956,258.662 ; 615.546,313.8 615.646,313.7 615.646,313.165 618.456,310.355 618.456,310 618.956,309.5 ; 615.546,364.639 615.646,364.539 615.646,364.004 618.456,361.194 618.456,360.839 618.956,360.339 ; 616.416,124.914 616.816,124.514 617.443,124.514 620.988,120.969 622.512,120.969 ; 616.416,175.752 616.816,175.352 617.443,175.352 620.988,171.807 622.512,171.807 ; 616.416,226.591 616.816,226.191 617.443,226.191 620.988,222.646 622.512,222.646 ; 616.416,277.43 616.816,277.03 617.443,277.03 620.988,273.485 622.512,273.485 ; 616.416,328.268 616.816,327.868 617.443,327.868 620.988,324.323 622.512,324.323 ; 616.416,379.107 616.816,378.707 617.443,378.707 620.988,375.162 622.512,375.162 ; 619.196,106.386 619.464,106.119 619.464,106.019 ; 619.196,157.225 619.464,156.957 619.464,156.857 ; 619.196,208.064 619.464,207.796 619.464,207.696 ; 619.196,258.902 619.464,258.635 619.464,258.535 ; 619.196,309.741 619.464,309.473 619.464,309.373 ; 619.196,360.579 619.464,360.312 619.464,360.212 ; 629.497,104.136 629.497,105.749 ; 629.497,154.975 629.497,156.587 ; 629.497,205.814 629.497,207.426 ; 629.497,256.652 629.497,258.265 ; 629.497,307.491 629.497,309.103 ; 629.497,358.329 629.497,359.942 ; 638.26,102.173 638.26,102.681 639.403,103.824 640.546,103.824 ; 638.26,153.011 638.26,153.519 639.403,154.662 640.546,154.662 ; 638.26,203.85 638.26,204.358 639.403,205.501 640.546,205.501 ; 638.26,254.689 638.26,255.197 639.403,256.34 640.546,256.34 ; 638.26,305.527 638.26,306.035 639.403,307.178 640.546,307.178 ; 638.26,356.366 638.26,356.874 639.403,358.017 640.546,358.017 ; 654.7,110.446 654.8,110.346 654.8,109.811 657.61,107.001 657.61,106.646 658.11,106.146 ; 654.7,161.284 654.8,161.184 654.8,160.649 657.61,157.839 657.61,157.484 658.11,156.984 ; 654.7,212.123 654.8,212.023 654.8,211.488 657.61,208.678 657.61,208.323 658.11,207.823 ; 654.7,262.962 654.8,262.862 654.8,262.327 657.61,259.517 657.61,259.162 658.11,258.662 ; 654.7,313.8 654.8,313.7 654.8,313.165 657.61,310.355 657.61,310 658.11,309.5 ; 654.7,364.639 654.8,364.539 654.8,364.004 657.61,361.194 657.61,360.839 658.11,360.339 ; 655.57,124.914 655.97,124.514 656.597,124.514 660.142,120.969 661.666,120.969 ; 655.57,175.752 655.97,175.352 656.597,175.352 660.142,171.807 661.666,171.807 ; 655.57,226.591 655.97,226.191 656.597,226.191 660.142,222.646 661.666,222.646 ; 655.57,277.43 655.97,277.03 656.597,277.03 660.142,273.485 661.666,273.485 ; 655.57,328.268 655.97,327.868 656.597,327.868 660.142,324.323 661.666,324.323 ; 655.57,379.107 655.97,378.707 656.597,378.707 660.142,375.162 661.666,375.162 ; 658.351,106.386 658.618,106.119 658.618,106.019 ; 658.351,157.225 658.618,156.957 658.618,156.857 ; 658.351,208.064 658.618,207.796 658.618,207.696 ; 658.351,258.902 658.618,258.635 658.618,258.535 ; 658.351,309.741 658.618,309.473 658.618,309.373 ; 658.351,360.579 658.618,360.312 658.618,360.212 ; 668.651,104.136 668.651,105.749 ; 668.651,154.975 668.651,156.587 ; 668.651,205.814 668.651,207.426 ; 668.651,256.652 668.651,258.265 ; 668.651,307.491 668.651,309.103 ; 668.651,358.329 668.651,359.942 ; 677.414,102.173 677.414,102.681 678.557,103.824 679.7,103.824 ; 677.414,153.011 677.414,153.519 678.557,154.662 679.7,154.662 ; 677.414,203.85 677.414,204.358 678.557,205.501 679.7,205.501 ; 677.414,254.689 677.414,255.197 678.557,256.34 679.7,256.34 ; 677.414,305.527 677.414,306.035 678.557,307.178 679.7,307.178 ; 677.414,356.366 677.414,356.874 678.557,358.017 679.7,358.017